# EAGLE board breakout1_laid_out (EAGLE 6.6.0)
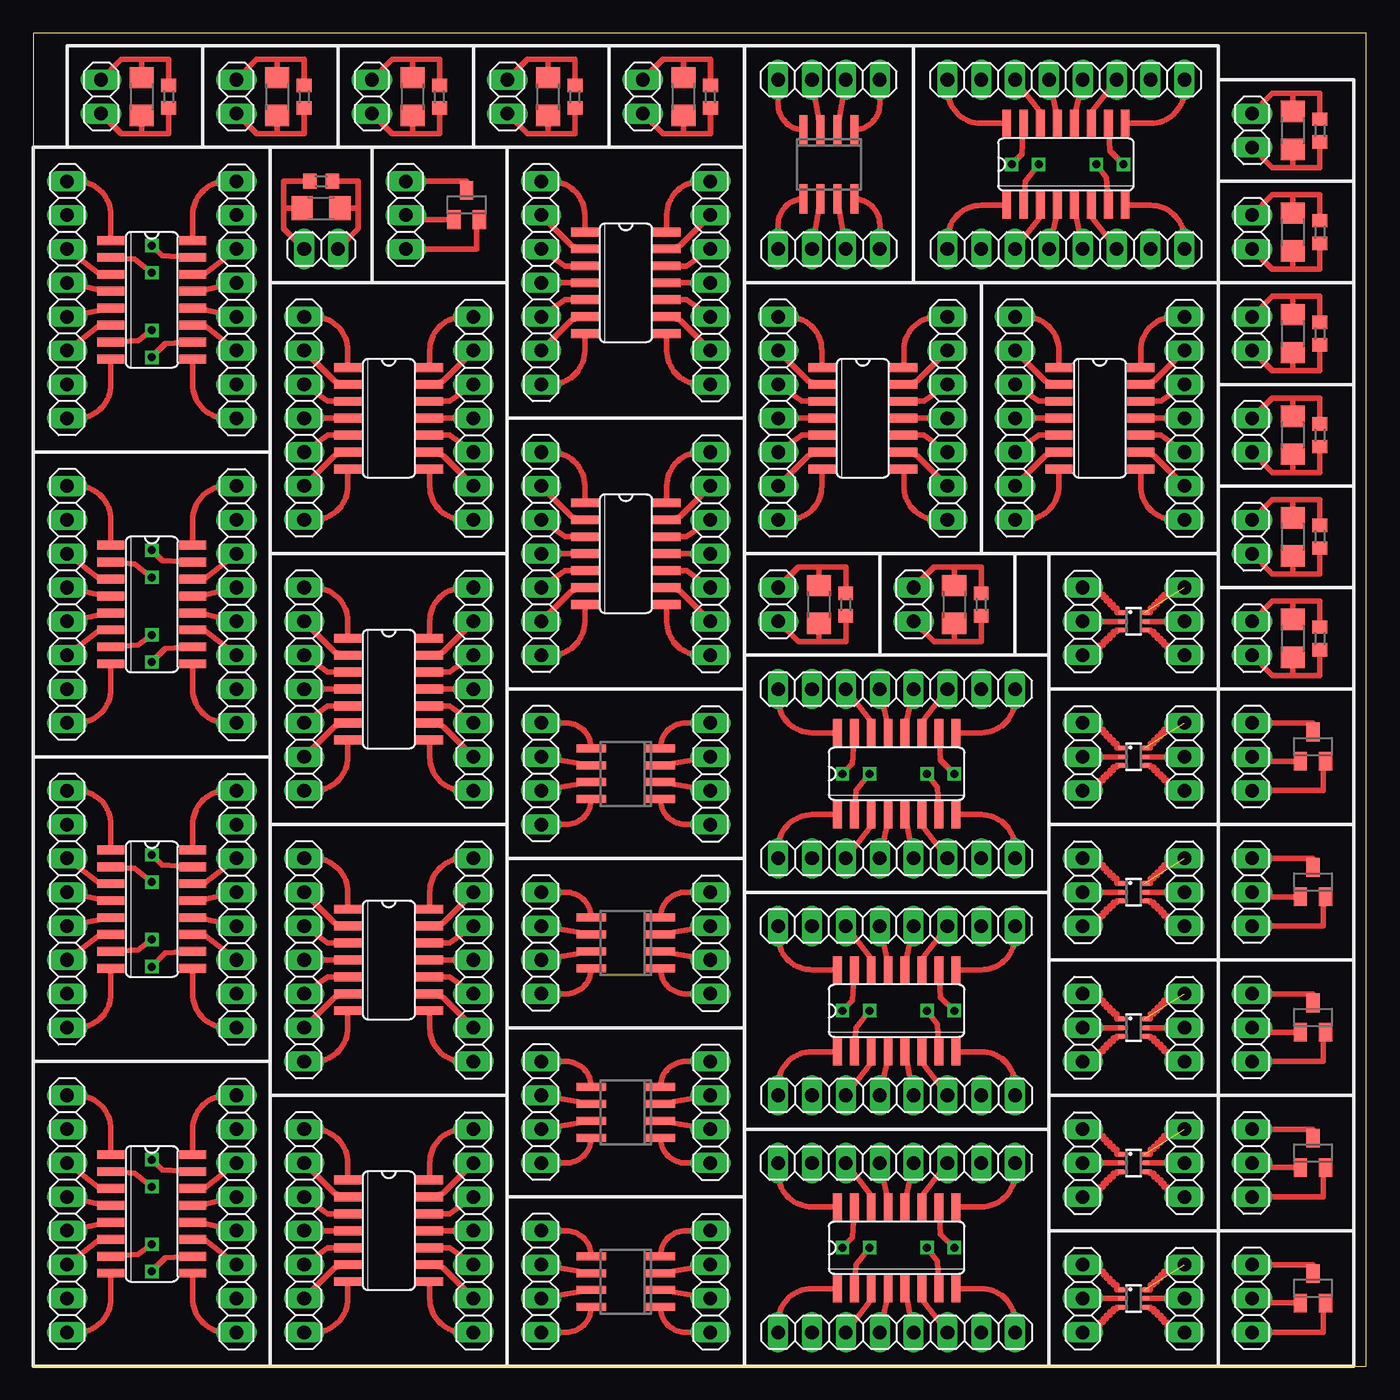
[diagram p0: board, top side]
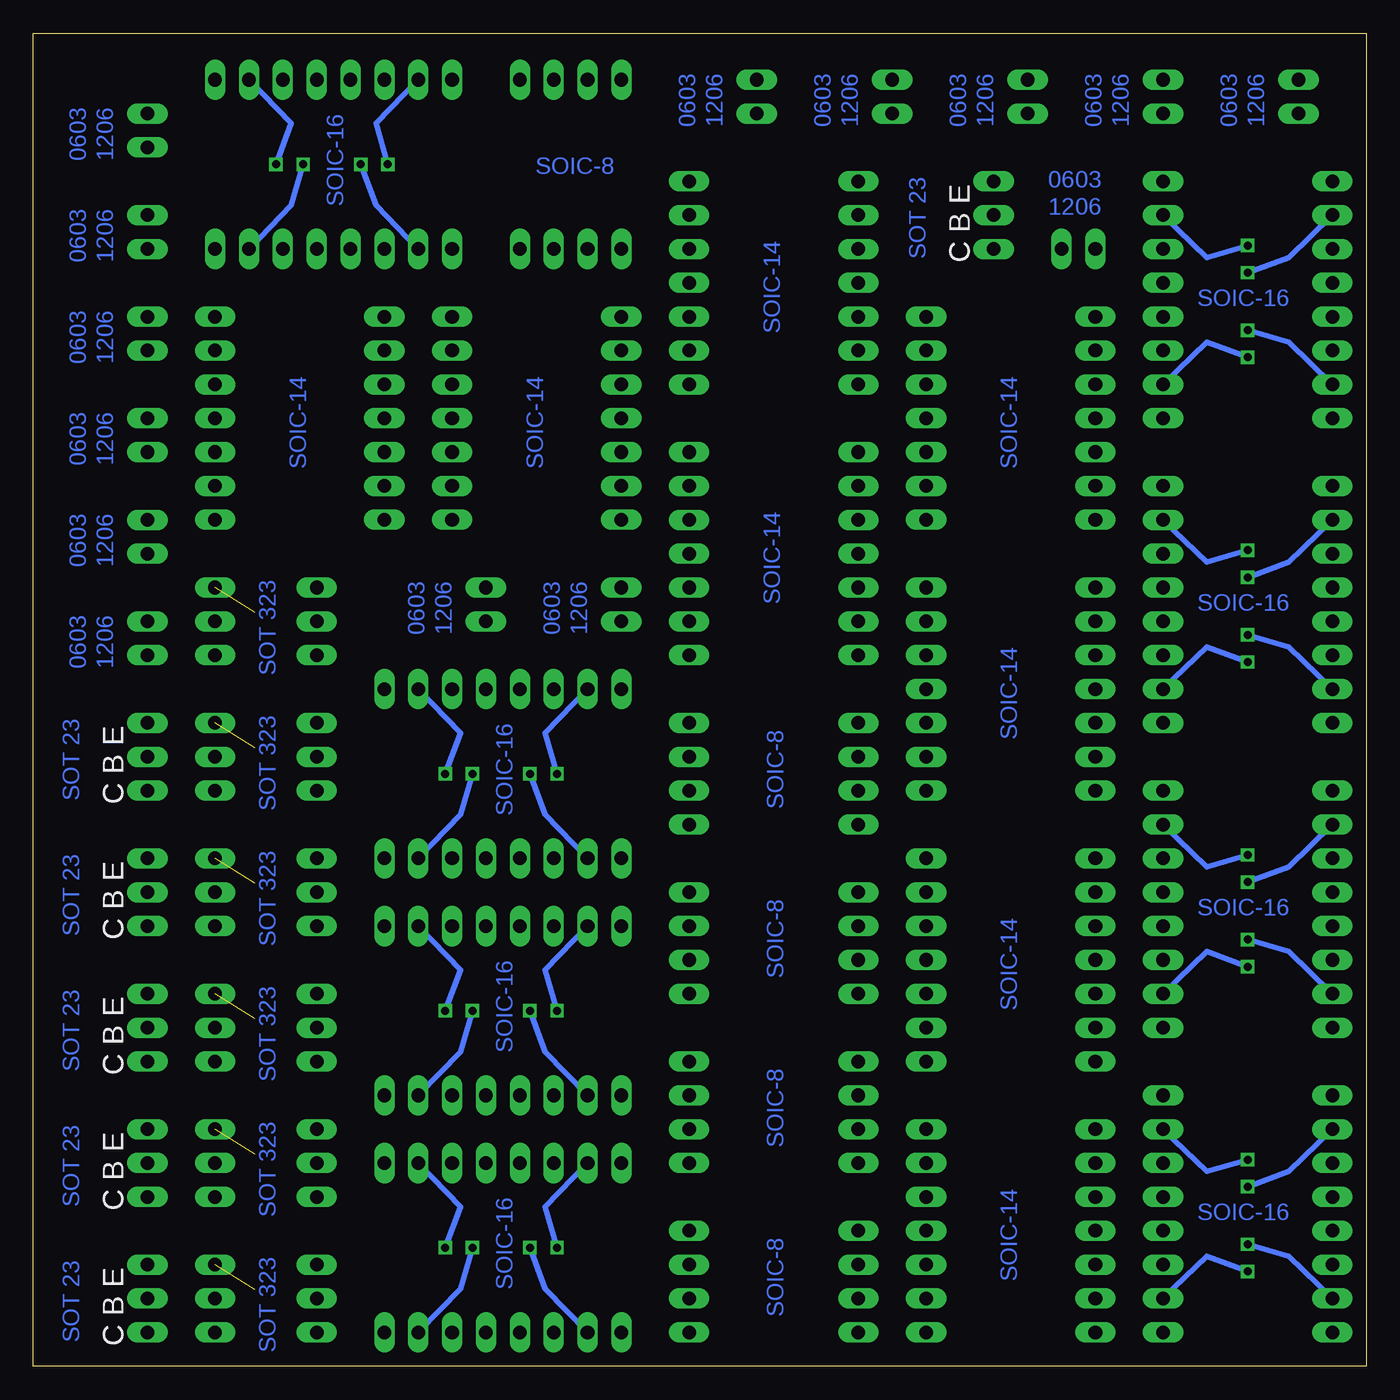
[diagram p1: board, bottom side, seen from below]

Size 100 x 100 mm. Coordinates in mm from the lower left corner, seen from the top.
Outline: 0,0 100,0 100,100 0,100 0,0
Copper layers (1*16): Top 0.035mm / dielectric 1.5mm / Bottom 0.035mm
Design rules "default": minimum track width 10mil, minimum drill 24mil, track to track 8mil, track to pad 8mil, pad to pad 8mil, via to via 8mil, smd to smd 8mil, copper to edge 40mil, drill to drill 8mil, minimum pad ring 10mil, minimum via ring 8mil, stop-mask expansion 4mil, vias tented up to drill 0mil, thermal gap 10mil

## Footprints (pad centres in the part's own frame; a part is rotated, then mirrored left to right if it is on the bottom)
SO16 = smd 0.66 x 2.032: 1 -4.445,-3.073; 2 -3.175,-3.073; 3 -1.905,-3.073; 4 -0.635,-3.073; 5 0.635,-3.073; 6 1.905,-3.073; 7 3.175,-3.073; 8 4.445,-3.073; 9 4.445,3.073; 10 3.175,3.073; 11 1.905,3.073; 12 0.635,3.073; 13 -0.635,3.073; 14 -1.905,3.073; 15 -3.175,3.073; 16 -4.445,3.073
SO08 = smd 0.6 x 2.2: 1 -1.905,-2.6; 2 -0.635,-2.6; 3 0.635,-2.6; 4 1.905,-2.6; 5 1.905,2.6; 6 0.635,2.6; 7 -0.635,2.6; 8 -1.905,2.6
SO14 = smd 0.66 x 2.032: 1 -3.81,-3.073; 2 -2.54,-3.073; 3 -1.27,-3.073; 4 0,-3.073; 5 1.27,-3.073; 6 2.54,-3.073; 7 3.81,-3.073; 8 3.81,3.073; 9 2.54,3.073; 10 1.27,3.073; 11 0,3.073; 12 -1.27,3.073; 13 -2.54,3.073; 14 -3.81,3.073
1X03 = drill 1.016 long: 1 -2.54,0; 2 0,0; 3 2.54,0
1X08 = drill 1.016 long: 1 -8.89,0; 2 -6.35,0; 3 -3.81,0; 4 -1.27,0; 5 1.27,0; 6 3.81,0; 7 6.35,0; 8 8.89,0
1X04 = drill 1.016 long: 1 -3.81,0; 2 -1.27,0; 3 1.27,0; 4 3.81,0
1X07 = drill 1.016 long: 1 -7.62,0; 2 -5.08,0; 3 -2.54,0; 4 0,0; 5 2.54,0; 6 5.08,0; 7 7.62,0
1X02 = drill 1.016 long: 1 -1.27,0; 2 1.27,0
SOT23 = smd 1 x 1.4: 1 -0.95,-1.1; 2 0.95,-1.1; 3 0,1.1
R0603 = smd 1 x 1.1: 1 -0.85,0; 2 0.85,0
R1206 = smd 1.6 x 1.803: 1 -1.422,0; 2 1.422,0
SOT363 = smd 0.3 x 0.7: 1 -0.65,-0.8; 2 0,-0.8; 3 0.65,-0.8; 4 0.65,0.8; 5 0,0.8; 6 -0.65,0.8

## Placement (x,y rotation side)
IC1  74LS151D  [SO16]  8.89,34.29 270 top
IC3  NE555D  [SO08]  44.45,6.35 90 top
IC4  74LS151D  [SO16]  8.89,11.43 270 top
IC5  74LS151D  [SO16]  8.89,57.15 270 top
IC7  74LS03D  [SO14]  26.67,10.16 270 top
IC8  74LS03D  [SO14]  26.67,30.48 270 top
IC10  NE555D  [SO08]  44.45,19.05 90 top
IC13  74LS151D  [SO16]  8.89,80.01 270 top
IC14  74LS03D  [SO14]  26.67,50.8 270 top
IC15  74LS03D  [SO14]  26.67,71.12 270 top
IC16  74LS03D  [SO14]  44.45,81.28 270 top
IC17  NE555D  [SO08]  44.45,31.75 90 top
IC18  NE555D  [SO08]  44.45,44.45 90 top
IC19  74LS03D  [SO14]  44.45,60.96 270 top
IC21  74LS151D  [SO16]  64.77,8.89 0 top
IC22  74LS151D  [SO16]  64.77,26.67 0 top
IC23  74LS151D  [SO16]  64.77,44.45 0 top
IC24  74LS03D  [SO14]  62.23,71.12 270 top
IC25  74LS03D  [SO14]  80.01,71.12 270 top
IC26  74LS151D  [SO16]  77.47,90.17 0 top
IC27  NE555D  [SO08]  59.69,90.17 180 top
JP1  [1X03]  78.74,5.08 90 top
JP2  [1X03]  86.36,5.08 90 top
JP5  [1X08]  15.24,34.29 90 top
JP6  [1X08]  2.54,34.29 270 top
JP9  [1X04]  50.8,6.35 90 top
JP10  [1X04]  38.1,6.35 270 top
JP11  [1X08]  15.24,11.43 90 top
JP12  [1X08]  2.54,11.43 270 top
JP13  [1X08]  15.24,57.15 90 top
JP14  [1X08]  2.54,57.15 270 top
JP17  [1X07]  20.32,10.16 270 top
JP18  [1X07]  33.02,10.16 90 top
JP19  [1X07]  20.32,30.48 270 top
JP20  [1X07]  33.02,30.48 90 top
JP23  [1X02]  91.44,92.71 270 top
JP24  [1X02]  91.44,85.09 270 top
JP25  [1X02]  5.08,95.25 270 top
JP31  [1X03]  78.74,15.24 90 top
JP32  [1X03]  86.36,15.24 90 top
JP35  [1X04]  50.8,19.05 90 top
JP36  [1X04]  38.1,19.05 270 top
JP41  [1X08]  15.24,80.01 90 top
JP42  [1X08]  2.54,80.01 270 top
JP43  [1X07]  20.32,50.8 270 top
JP44  [1X07]  33.02,50.8 90 top
JP45  [1X07]  20.32,71.12 270 top
JP46  [1X07]  33.02,71.12 90 top
JP47  [1X07]  38.1,81.28 270 top
JP48  [1X07]  50.8,81.28 90 top
JP49  [1X03]  91.44,5.08 270 top
JP50  [1X03]  91.44,15.24 270 top
JP51  [1X03]  91.44,25.4 270 top
JP52  [1X03]  91.44,35.56 270 top
JP53  [1X03]  91.44,45.72 270 top
JP54  [1X02]  91.44,62.23 270 top
JP55  [1X02]  91.44,77.47 270 top
JP56  [1X02]  91.44,69.85 270 top
JP57  [1X04]  50.8,31.75 90 top
JP58  [1X04]  38.1,31.75 270 top
JP59  [1X04]  50.8,44.45 90 top
JP60  [1X04]  38.1,44.45 270 top
JP61  [1X07]  38.1,60.96 270 top
JP62  [1X07]  50.8,60.96 90 top
JP63  [1X02]  21.59,83.82 0 top
JP65  [1X02]  91.44,54.61 270 top
JP66  [1X03]  78.74,45.72 90 top
JP67  [1X03]  86.36,45.72 90 top
JP68  [1X03]  78.74,55.88 90 top
JP69  [1X03]  86.36,55.88 90 top
JP70  [1X03]  78.74,25.4 90 top
JP71  [1X03]  86.36,25.4 90 top
JP72  [1X03]  78.74,35.56 90 top
JP73  [1X03]  86.36,35.56 90 top
JP74  [1X08]  64.77,15.24 180 top
JP75  [1X08]  64.77,2.54 0 top
JP76  [1X08]  64.77,33.02 180 top
JP77  [1X08]  64.77,20.32 0 top
JP78  [1X08]  64.77,50.8 180 top
JP79  [1X08]  64.77,38.1 0 top
JP80  [1X02]  55.88,57.15 270 top
JP81  [1X02]  66.04,57.15 270 top
JP82  [1X07]  55.88,71.12 270 top
JP83  [1X07]  68.58,71.12 90 top
JP84  [1X07]  73.66,71.12 270 top
JP85  [1X07]  86.36,71.12 90 top
JP86  [1X08]  77.47,96.52 180 top
JP87  [1X08]  77.47,83.82 0 top
JP88  [1X04]  59.69,96.52 180 top
JP89  [1X04]  59.69,83.82 0 top
JP91  [1X03]  27.94,86.36 270 top
JP92  [1X02]  15.24,95.25 270 top
JP93  [1X02]  25.4,95.25 270 top
JP94  [1X02]  35.56,95.25 270 top
JP95  [1X02]  45.72,95.25 270 top
Q5  BCX70SMD  [SOT23]  96.01,5.84 0 top
Q6  BCX70SMD  [SOT23]  96.01,16 0 top
Q7  BCX70SMD  [SOT23]  96.01,26.16 0 top
Q8  BCX70SMD  [SOT23]  96.01,36.32 0 top
Q9  BCX70SMD  [SOT23]  96.01,46.48 0 top
Q10  BCX70SMD  [SOT23]  32.51,87.12 0 top
R1  [R0603]  96.52,92.71 90 top
R3  [R1206]  94.49,92.71 90 top
R5  [R0603]  96.52,85.09 90 top
R6  [R1206]  94.49,85.09 90 top
R7  [R0603]  10.16,95.25 90 top
R8  [R1206]  8.13,95.25 90 top
R9  [R0603]  96.52,77.47 90 top
R10  [R1206]  94.49,77.47 90 top
R11  [R0603]  96.52,69.85 90 top
R12  [R1206]  94.49,69.85 90 top
R13  [R0603]  96.52,62.23 90 top
R14  [R1206]  94.49,62.23 90 top
R15  [R0603]  96.52,54.61 90 top
R16  [R1206]  94.49,54.61 90 top
R17  [R0603]  60.96,57.15 90 top
R18  [R1206]  58.93,57.15 90 top
R19  [R0603]  71.12,57.15 90 top
R20  [R1206]  69.09,57.15 90 top
R21  [R0603]  21.59,88.9 180 top
R22  [R1206]  21.59,86.87 180 top
R23  [R0603]  20.32,95.25 90 top
R24  [R1206]  18.29,95.25 90 top
R25  [R0603]  30.48,95.25 90 top
R26  [R1206]  28.45,95.25 90 top
R27  [R0603]  40.64,95.25 90 top
R28  [R1206]  38.61,95.25 90 top
R29  [R0603]  50.8,95.25 90 top
R30  [R1206]  48.77,95.25 90 top
U$1  DMMT3904W  [SOT363]  82.55,5.08 270 top
U$3  DMMT3904W  [SOT363]  82.55,15.24 270 top
U$5  DMMT3904W  [SOT363]  82.55,45.72 270 top
U$6  DMMT3904W  [SOT363]  82.55,55.88 270 top
U$7  DMMT3904W  [SOT363]  82.55,25.4 270 top
U$8  DMMT3904W  [SOT363]  82.55,35.56 270 top

## Library data of the parts
IC1 IC4 IC5 IC7 IC8 IC13-IC16 IC19 IC21-IC26 = 74xx-us
IC3 IC10 IC17 IC18 IC27 = linear
JP1 JP2 JP5 JP6 JP9-JP14 JP17-JP20 JP23-JP25 JP31 JP32 JP35 JP36 JP41-JP63 JP65-JP89 JP91-JP95 = pinhead
Q5-Q10 = transistor-npn
R1 R3 R5-R30 = rcl
U$1 U$3 U$5-U$8 = !synth_sch

## Nets
N$1: JP1.3 U$1.1
N$2: JP1.2 U$1.2
N$3: JP1.1 U$1.3
N$4: JP2.1 U$1.4
N$5: JP2.2 U$1.5
N$6: JP2.3 U$1.6
N$9: IC4.1 JP12.1
N$13: IC1.1 JP6.1
N$14: IC1.2 JP6.2
N$15: IC1.3 JP6.3
N$16: IC1.4 JP6.4
N$17: IC1.7 JP6.7
N$18: IC1.5 JP6.5
N$19: IC1.6 JP6.6
N$20: IC1.8 JP6.8
N$21: IC1.9 JP5.1
N$22: IC1.10 JP5.2
N$23: IC1.11 JP5.3
N$24: IC1.12 JP5.4
N$25: IC1.13 JP5.5
N$26: IC1.14 JP5.6
N$27: IC1.15 JP5.7
N$28: IC1.16 JP5.8
N$44: IC3.1 JP9.1
N$45: IC3.2 JP9.2
N$46: IC3.4 JP9.4
N$47: IC3.3 JP9.3
N$48: IC3.5 JP10.1
N$49: IC3.6 JP10.2
N$50: IC3.7 JP10.3
N$51: IC3.8 JP10.4
N$52: IC4.2 JP12.2
N$54: IC4.3 JP12.3
N$55: IC4.4 JP12.4
N$56: IC4.7 JP12.7
N$57: IC4.5 JP12.5
N$58: IC4.6 JP12.6
N$59: IC4.8 JP12.8
N$60: IC4.9 JP11.1
N$61: IC4.10 JP11.2
N$62: IC4.11 JP11.3
N$63: IC4.12 JP11.4
N$64: IC4.13 JP11.5
N$65: IC4.14 JP11.6
N$66: IC4.16 JP11.8
N$67: IC4.15 JP11.7
N$68: IC5.1 JP14.1
N$69: IC5.2 JP14.2
N$70: IC5.3 JP14.3
N$71: IC5.4 JP14.4
N$72: IC5.7 JP14.7
N$73: IC5.5 JP14.5
N$74: IC5.6 JP14.6
N$75: IC5.8 JP14.8
N$76: IC5.9 JP13.1
N$77: IC5.10 JP13.2
N$78: IC5.11 JP13.3
N$79: IC5.12 JP13.4
N$80: IC5.13 JP13.5
N$81: IC5.14 JP13.6
N$82: IC5.16 JP13.8
N$83: IC5.15 JP13.7
N$100: IC7.1 JP17.1
N$101: IC7.2 JP17.2
N$102: IC7.4 JP17.4
N$103: IC7.5 JP17.5
N$104: IC7.6 JP17.6
N$105: IC7.3 JP17.3
N$106: IC7.8 JP18.1
N$107: IC7.9 JP18.2
N$108: IC7.10 JP18.3
N$109: IC7.11 JP18.4
N$110: IC7.12 JP18.5
N$111: IC7.13 JP18.6
N$112: IC7.14 JP18.7
N$113: IC7.7 JP17.7
N$114: IC8.1 JP19.1
N$115: IC8.2 JP19.2
N$116: IC8.4 JP19.4
N$117: IC8.5 JP19.5
N$118: IC8.6 JP19.6
N$119: IC8.3 JP19.3
N$120: IC8.8 JP20.1
N$121: IC8.9 JP20.2
N$122: IC8.10 JP20.3
N$123: IC8.11 JP20.4
N$124: IC8.12 JP20.5
N$125: IC8.13 JP20.6
N$126: IC8.14 JP20.7
N$127: IC8.7 JP19.7
N$142: JP23.1 R1.2 R3.2
N$143: JP23.2 R1.1 R3.1
N$144: JP24.1 R5.2 R6.2
N$145: JP24.2 R5.1 R6.1
N$146: JP25.1 R7.2 R8.2
N$147: JP25.2 R7.1 R8.1
N$164: JP31.1 U$3.3
N$165: JP31.2 U$3.2
N$166: JP31.3 U$3.1
N$167: JP32.1 U$3.4
N$168: JP32.2 U$3.5
N$169: JP32.3 U$3.6
N$178: IC10.1 JP35.1
N$179: IC10.2 JP35.2
N$180: IC10.4 JP35.4
N$181: IC10.3 JP35.3
N$182: IC10.5 JP36.1
N$183: IC10.6 JP36.2
N$184: IC10.7 JP36.3
N$185: IC10.8 JP36.4
N$202: IC13.1 JP42.1
N$203: IC13.2 JP42.2
N$204: IC13.3 JP42.3
N$205: IC13.4 JP42.4
N$206: IC13.7 JP42.7
N$207: IC13.5 JP42.5
N$208: IC13.6 JP42.6
N$209: IC13.8 JP42.8
N$210: IC13.9 JP41.1
N$211: IC13.10 JP41.2
N$212: IC13.11 JP41.3
N$213: IC13.12 JP41.4
N$214: IC13.13 JP41.5
N$215: IC13.14 JP41.6
N$216: IC13.16 JP41.8
N$217: IC13.15 JP41.7
N$218: IC14.1 JP43.1
N$219: IC14.2 JP43.2
N$220: IC14.4 JP43.4
N$221: IC14.5 JP43.5
N$222: IC14.6 JP43.6
N$223: IC14.3 JP43.3
N$224: IC14.8 JP44.1
N$225: IC14.9 JP44.2
N$226: IC14.10 JP44.3
N$227: IC14.11 JP44.4
N$228: IC14.12 JP44.5
N$229: IC14.13 JP44.6
N$230: IC14.14 JP44.7
N$231: IC14.7 JP43.7
N$232: IC15.1 JP45.1
N$233: IC15.2 JP45.2
N$234: IC15.4 JP45.4
N$235: IC15.5 JP45.5
N$236: IC15.6 JP45.6
N$237: IC15.3 JP45.3
N$238: IC15.8 JP46.1
N$239: IC15.9 JP46.2
N$240: IC15.10 JP46.3
N$241: IC15.11 JP46.4
N$242: IC15.12 JP46.5
N$243: IC15.13 JP46.6
N$244: IC15.14 JP46.7
N$245: IC15.7 JP45.7
N$246: IC16.1 JP47.1
N$247: IC16.2 JP47.2
N$248: IC16.4 JP47.4
N$249: IC16.5 JP47.5
N$250: IC16.6 JP47.6
N$251: IC16.3 JP47.3
N$252: IC16.8 JP48.1
N$253: IC16.9 JP48.2
N$254: JP49.2 Q5.1
N$255: JP49.3 Q5.2
N$256: JP49.1 Q5.3
N$257: JP50.2 Q6.1
N$258: JP50.3 Q6.2
N$259: JP50.1 Q6.3
N$260: JP51.2 Q7.1
N$261: JP51.3 Q7.2
N$262: JP51.1 Q7.3
N$263: JP52.2 Q8.1
N$264: JP52.3 Q8.2
N$265: JP52.1 Q8.3
N$266: JP53.2 Q9.1
N$267: JP53.3 Q9.2
N$268: JP53.1 Q9.3
N$269: JP54.1 R13.2 R14.2
N$270: JP54.2 R13.1 R14.1
N$271: JP65.1 R15.2 R16.2
N$272: JP55.1 R9.2 R10.2
N$273: JP55.2 R9.1 R10.1
N$274: JP56.1 R11.2 R12.2
N$275: JP56.2 R11.1 R12.1
N$276: JP65.2 R15.1 R16.1
N$277: JP66.1 U$5.3
N$278: IC17.1 JP57.1
N$279: IC17.2 JP57.2
N$280: IC17.4 JP57.4
N$281: IC17.3 JP57.3
N$282: IC17.5 JP58.1
N$283: IC17.6 JP58.2
N$284: IC17.7 JP58.3
N$285: IC17.8 JP58.4
N$286: IC18.1 JP59.1
N$287: IC18.2 JP59.2
N$288: IC18.4 JP59.4
N$289: IC18.3 JP59.3
N$290: IC18.5 JP60.1
N$291: IC18.6 JP60.2
N$292: IC18.7 JP60.3
N$293: IC18.8 JP60.4
N$294: IC19.1 JP61.1
N$295: IC19.2 JP61.2
N$296: IC19.4 JP61.4
N$297: IC19.5 JP61.5
N$298: IC19.6 JP61.6
N$299: IC19.3 JP61.3
N$300: IC19.8 JP62.1
N$301: IC19.9 JP62.2
N$302: IC19.10 JP62.3
N$303: IC19.11 JP62.4
N$304: IC19.12 JP62.5
N$305: IC19.13 JP62.6
N$306: IC19.14 JP62.7
N$307: IC19.7 JP61.7
N$308: IC16.10 JP48.3
N$309: IC16.11 JP48.4
N$310: IC16.12 JP48.5
N$311: IC16.13 JP48.6
N$312: IC16.14 JP48.7
N$313: IC16.7 JP47.7
N$314: JP63.1 R21.2 R22.2
N$315: JP63.2 R21.1 R22.1
N$323: JP91.2 Q10.1
N$324: JP66.2 U$5.2
N$325: JP66.3 U$5.1
N$326: JP67.1 U$5.4
N$327: JP67.2 U$5.5
N$328: JP67.3 U$5.6
N$330: JP68.1 U$6.3
N$331: JP68.2 U$6.2
N$332: JP68.3 U$6.1
N$333: JP69.1 U$6.4
N$334: JP69.2 U$6.5
N$335: JP69.3 U$6.6
N$337: JP70.1 U$7.3
N$338: JP70.2 U$7.2
N$339: JP70.3 U$7.1
N$340: JP71.1 U$7.4
N$341: JP71.2 U$7.5
N$342: JP71.3 U$7.6
N$344: JP72.1 U$8.3
N$345: JP72.2 U$8.2
N$346: JP72.3 U$8.1
N$347: JP73.1 U$8.4
N$348: JP73.2 U$8.5
N$349: JP73.3 U$8.6
N$359: IC21.1 JP75.1
N$360: IC21.2 JP75.2
N$361: IC21.3 JP75.3
N$362: IC21.4 JP75.4
N$363: IC21.7 JP75.7
N$364: IC21.5 JP75.5
N$365: IC21.6 JP75.6
N$366: IC21.8 JP75.8
N$367: IC21.9 JP74.1
N$368: IC21.10 JP74.2
N$369: IC21.11 JP74.3
N$370: IC21.12 JP74.4
N$371: IC21.13 JP74.5
N$372: IC21.14 JP74.6
N$373: IC21.16 JP74.8
N$374: IC21.15 JP74.7
N$375: IC22.1 JP77.1
N$376: IC22.2 JP77.2
N$377: IC22.3 JP77.3
N$378: IC22.4 JP77.4
N$379: IC22.7 JP77.7
N$380: IC22.5 JP77.5
N$381: IC22.6 JP77.6
N$382: IC22.8 JP77.8
N$383: IC22.9 JP76.1
N$384: IC22.10 JP76.2
N$385: IC22.11 JP76.3
N$386: IC22.12 JP76.4
N$387: IC22.13 JP76.5
N$388: IC22.14 JP76.6
N$389: IC22.16 JP76.8
N$390: IC22.15 JP76.7
N$391: IC23.1 JP79.1
N$392: IC23.2 JP79.2
N$393: IC23.3 JP79.3
N$394: IC23.4 JP79.4
N$395: IC23.7 JP79.7
N$396: IC23.5 JP79.5
N$397: IC23.6 JP79.6
N$398: IC23.8 JP79.8
N$399: IC23.9 JP78.1
N$400: IC23.10 JP78.2
N$401: IC23.11 JP78.3
N$402: IC23.12 JP78.4
N$403: IC23.13 JP78.5
N$404: IC23.14 JP78.6
N$405: IC23.16 JP78.8
N$406: IC23.15 JP78.7
N$407: JP80.1 R17.2 R18.2
N$408: JP80.2 R17.1 R18.1
N$409: JP81.1 R19.2 R20.2
N$410: JP81.2 R19.1 R20.1
N$411: IC24.1 JP82.1
N$412: IC24.2 JP82.2
N$413: IC24.4 JP82.4
N$414: IC24.5 JP82.5
N$415: IC24.6 JP82.6
N$416: IC24.3 JP82.3
N$417: IC24.8 JP83.1
N$418: IC24.9 JP83.2
N$419: IC24.10 JP83.3
N$420: IC24.11 JP83.4
N$421: IC24.12 JP83.5
N$422: IC24.13 JP83.6
N$423: IC24.14 JP83.7
N$424: IC24.7 JP82.7
N$425: IC25.1 JP84.1
N$426: IC25.2 JP84.2
N$427: IC25.4 JP84.4
N$428: IC25.5 JP84.5
N$429: IC25.6 JP84.6
N$430: IC25.3 JP84.3
N$431: IC25.8 JP85.1
N$432: IC25.9 JP85.2
N$433: IC25.10 JP85.3
N$434: IC25.11 JP85.4
N$435: IC25.12 JP85.5
N$436: IC25.13 JP85.6
N$437: IC25.14 JP85.7
N$438: IC25.7 JP84.7
N$439: IC26.1 JP87.1
N$440: IC26.2 JP87.2
N$441: IC26.3 JP87.3
N$442: IC26.4 JP87.4
N$443: IC26.7 JP87.7
N$444: IC26.5 JP87.5
N$445: IC26.6 JP87.6
N$446: IC26.8 JP87.8
N$447: IC26.9 JP86.1
N$448: IC26.10 JP86.2
N$449: IC26.11 JP86.3
N$450: IC26.12 JP86.4
N$451: IC26.13 JP86.5
N$452: IC26.14 JP86.6
N$453: IC26.16 JP86.8
N$454: IC26.15 JP86.7
N$455: IC27.1 JP88.1
N$456: IC27.2 JP88.2
N$457: IC27.4 JP88.4
N$458: IC27.3 JP88.3
N$459: IC27.5 JP89.1
N$460: IC27.6 JP89.2
N$461: IC27.7 JP89.3
N$462: IC27.8 JP89.4
N$463: JP91.3 Q10.2
N$464: JP91.1 Q10.3
N$465: JP92.1 R23.2 R24.2
N$466: JP92.2 R23.1 R24.1
N$467: JP93.1 R25.2 R26.2
N$468: JP93.2 R25.1 R26.1
N$469: JP94.1 R27.2 R28.2
N$470: JP94.2 R27.1 R28.1
N$471: JP95.1 R29.2 R30.2
N$472: JP95.2 R29.1 R30.1

## Tracks (layer width: path | path; a pad name or v marks a point on that pad's centre or on a via)
N$1
  Top 0.406: U$1.1 81.28,5.73 81.28,6.1 81.03,6.1 81.03,6.35 80.77,6.35 80.77,6.6 80.52,6.6 80.52,6.86 80.26,6.86 80.26,7.11 80.01,7.11 80.01,7.37 79.76,7.37 79.76,7.62 JP1.3
N$2
  Top 0.406: U$1.2 JP1.2
N$3
  Top 0.406: U$1.3 81.28,4.43 81.28,4.32 81.03,4.32 81.03,4.06 80.77,4.06 80.77,3.81 80.52,3.81 80.52,3.56 80.26,3.56 80.26,3.3 80.01,3.3 80.01,3.05 79.76,3.05 | 79.5,3.05 79.76,3.05 | 79.76,3.05 79.76,2.79 79.5,2.79 79.5,2.54 JP1.1
N$4
  Top 0.406: U$1.4 83.82,4.43 83.82,4.32 84.07,4.32 84.07,4.06 84.33,4.06 84.33,3.81 84.58,3.81 84.58,3.56 84.84,3.56 84.84,3.3 85.09,3.3 85.09,3.05 85.34,3.05 85.34,2.79 85.6,2.79 85.6,2.54 JP2.1
N$5
  Top 0.406: U$1.5 JP2.2
N$6  (1 unrouted)
N$7
  Top 0.406: 83.35,5.73 83.82,5.73 83.82,6.1 84.07,6.1 84.07,6.35 84.33,6.35 84.33,6.6 84.58,6.6 84.58,6.86 84.84,6.86 84.84,7.11 85.09,7.11 85.09,7.37 85.34,7.37 85.34,7.62 86.36,7.62
N$9
  Top 0.406: IC4.1 5.82,17.78 arc90 3.28,20.32 JP12.1
N$13
  Top 0.406: IC1.1 5.82,40.64 arc90 3.28,43.18 JP6.1
N$14  (via drill 0.6)
  Top 0.406: v8.89,36.32 7.62,37.34 IC1.2
  Bottom 0.406: JP6.2 IC1.2 v8.89,36.32
N$15
  Top 0.406: JP6.3 4.83,36.32 IC1.3
N$16
  Top 0.406: JP6.4 4.83,35.05 IC1.4
N$17  (via drill 0.6)
  Top 0.406: v8.89,32 7.87,31.24 IC1.7
  Bottom 0.406: JP6.7 IC1.7 v8.89,32
N$18
  Top 0.406: JP6.5 5.08,33.53 IC1.5
N$19
  Top 0.406: JP6.6 4.83,32.26 IC1.6
N$20
  Top 0.406: IC1.8 5.82,27.94 arc-90 3.28,25.4 JP6.8
N$21
  Top 0.406: IC1.9 11.96,27.94 arc90 14.5,25.4 JP5.1
N$22  (via drill 0.6)
  Top 0.406: v8.89,29.97 9.91,30.99 IC1.10
  Bottom 0.406: JP5.2 IC1.10 v8.89,29.97
N$23
  Top 0.406: JP5.3 12.95,32.26 IC1.11
N$24
  Top 0.406: JP5.4 12.95,33.53 IC1.12
N$25
  Top 0.406: JP5.5 12.95,35.05 IC1.13
N$26
  Top 0.406: JP5.6 12.95,36.32 IC1.14
N$27  (via drill 0.6)
  Top 0.406: v8.89,38.35 9.65,37.59 IC1.15
  Bottom 0.406: JP5.7 IC1.15 v8.89,38.35
N$28
  Top 0.406: IC1.16 11.96,40.64 arc-90 14.5,43.18 JP5.8
N$44
  Top 0.406: IC3.1 arc90 48.95,2.54 JP9.1
N$45
  Top 0.406: IC3.2 JP9.2
N$46
  Top 0.406: IC3.4 arc-90 48.95,10.16 JP9.4
N$47
  Top 0.406: IC3.3 JP9.3
N$48
  Top 0.406: IC3.5 arc90 39.95,10.16 JP10.1
N$49
  Top 0.406: IC3.6 JP10.2
N$50
  Top 0.406: IC3.7 JP10.3
N$51
  Top 0.406: IC3.8 arc-90 39.95,2.54 JP10.4
N$52  (via drill 0.6)
  Top 0.406: v8.89,13.46 7.62,14.48 IC4.2
  Bottom 0.406: JP12.2 IC4.2 v8.89,13.46
N$54
  Top 0.406: JP12.3 4.83,13.46 IC4.3
N$55
  Top 0.406: JP12.4 4.83,12.19 IC4.4
N$56  (via drill 0.6)
  Top 0.406: v8.89,9.14 7.87,8.38 IC4.7
  Bottom 0.406: JP12.7 IC4.7 v8.89,9.14
N$57
  Top 0.406: JP12.5 5.08,10.67 IC4.5
N$58
  Top 0.406: JP12.6 4.83,9.4 IC4.6
N$59
  Top 0.406: IC4.8 5.82,5.08 arc-90 3.28,2.54 JP12.8
N$60
  Top 0.406: IC4.9 11.96,5.08 arc90 14.5,2.54 JP11.1
N$61  (via drill 0.6)
  Top 0.406: v8.89,7.11 9.91,8.13 IC4.10
  Bottom 0.406: JP11.2 IC4.10 v8.89,7.11
N$62
  Top 0.406: JP11.3 12.95,9.4 IC4.11
N$63
  Top 0.406: JP11.4 12.95,10.67 IC4.12
N$64
  Top 0.406: JP11.5 12.95,12.19 IC4.13
N$65
  Top 0.406: JP11.6 12.95,13.46 IC4.14
N$66
  Top 0.406: IC4.16 11.96,17.78 arc-90 14.5,20.32 JP11.8
N$67  (via drill 0.6)
  Top 0.406: v8.89,15.49 9.65,14.73 IC4.15
  Bottom 0.406: JP11.7 IC4.15 v8.89,15.49
N$68
  Top 0.406: IC5.1 5.82,63.5 arc90 3.28,66.04 JP14.1
N$69  (via drill 0.6)
  Top 0.406: v8.89,59.18 7.62,60.2 IC5.2
  Bottom 0.406: JP14.2 IC5.2 v8.89,59.18
N$70
  Top 0.406: JP14.3 4.83,59.18 IC5.3
N$71
  Top 0.406: JP14.4 4.83,57.91 IC5.4
N$72  (via drill 0.6)
  Top 0.406: v8.89,54.86 7.87,54.1 IC5.7
  Bottom 0.406: JP14.7 IC5.7 v8.89,54.86
N$73
  Top 0.406: JP14.5 5.08,56.39 IC5.5
N$74
  Top 0.406: JP14.6 4.83,55.12 IC5.6
N$75
  Top 0.406: IC5.8 5.82,50.8 arc-90 3.28,48.26 JP14.8
N$76
  Top 0.406: IC5.9 11.96,50.8 arc90 14.5,48.26 JP13.1
N$77  (via drill 0.6)
  Top 0.406: v8.89,52.83 9.91,53.85 IC5.10
  Bottom 0.406: JP13.2 IC5.10 v8.89,52.83
N$78
  Top 0.406: JP13.3 12.95,55.12 IC5.11
N$79
  Top 0.406: JP13.4 12.95,56.39 IC5.12
N$80
  Top 0.406: JP13.5 12.95,57.91 IC5.13
N$81
  Top 0.406: JP13.6 12.95,59.18 IC5.14
N$82
  Top 0.406: IC5.16 11.96,63.5 arc-90 14.5,66.04 JP13.8
N$83  (via drill 0.6)
  Top 0.406: v8.89,61.21 9.65,60.45 IC5.15
  Bottom 0.406: JP13.7 IC5.15 v8.89,61.21
N$100
  Top 0.406: IC7.1 23.6,15.24 arc90 21.06,17.78 JP17.1
N$101
  Top 0.406: IC7.2 22.61,12.95 JP17.2
N$102
  Top 0.406: IC7.4 JP17.4
N$103
  Top 0.406: IC7.5 22.1,8.89 JP17.5
N$104
  Top 0.406: IC7.6 22.61,7.37 JP17.6
N$105
  Top 0.406: IC7.3 22.1,11.43 JP17.3
N$106
  Top 0.406: IC7.8 29.74,5.08 arc90 32.28,2.54 JP18.1
N$107
  Top 0.406: IC7.9 30.73,7.37 JP18.2
N$108
  Top 0.406: IC7.10 31.24,8.89 JP18.3
N$109
  Top 0.406: IC7.11 JP18.4
N$110
  Top 0.406: IC7.12 31.24,11.43 JP18.5
N$111
  Top 0.406: IC7.13 30.73,12.95 JP18.6
N$112
  Top 0.406: IC7.14 29.74,15.24 arc-90 32.28,17.78 JP18.7
N$113
  Top 0.406: IC7.7 23.6,5.08 arc-90 21.06,2.54 JP17.7
N$114
  Top 0.406: IC8.1 23.6,35.56 arc90 21.06,38.1 JP19.1
N$115
  Top 0.406: IC8.2 22.61,33.27 JP19.2
N$116
  Top 0.406: IC8.4 JP19.4
N$117
  Top 0.406: IC8.5 22.1,29.21 JP19.5
N$118
  Top 0.406: IC8.6 22.61,27.69 JP19.6
N$119
  Top 0.406: IC8.3 22.1,31.75 JP19.3
N$120
  Top 0.406: IC8.8 29.74,25.4 arc90 32.28,22.86 JP20.1
N$121
  Top 0.406: IC8.9 30.73,27.69 JP20.2
N$122
  Top 0.406: IC8.10 31.24,29.21 JP20.3
N$123
  Top 0.406: IC8.11 JP20.4
N$124
  Top 0.406: IC8.12 31.24,31.75 JP20.5
N$125
  Top 0.406: IC8.13 30.73,33.27 JP20.6
N$126
  Top 0.406: IC8.14 29.74,35.56 arc-90 32.28,38.1 JP20.7
N$127
  Top 0.406: IC8.7 23.6,25.4 arc-90 21.06,22.86 JP19.7
N$142
  Top 0.406: R1.2 96.52,95.5 94.49,95.5 | R3.2 94.49,95.5 | 94.49,95.5 92.96,95.5 JP23.1
N$143
  Top 0.406: R1.1 96.52,89.92 94.49,89.92 | R3.1 94.49,89.92 | 94.49,89.92 92.96,89.92 JP23.2
N$144
  Top 0.406: R5.2 96.52,87.88 94.49,87.88 | R6.2 94.49,87.88 | 94.49,87.88 92.96,87.88 JP24.1
N$145
  Top 0.406: R5.1 96.52,82.3 94.49,82.3 | R6.1 94.49,82.3 | 94.49,82.3 92.96,82.3 JP24.2
N$146
  Top 0.406: R7.2 10.16,98.04 8.13,98.04 | R8.2 8.13,98.04 | 8.13,98.04 6.6,98.04 JP25.1
N$147
  Top 0.406: R7.1 10.16,92.46 8.13,92.46 | R8.1 8.13,92.46 | 8.13,92.46 6.6,92.46 JP25.2
N$164
  Top 0.406: U$3.3 81.28,14.59 81.28,14.48 81.03,14.48 81.03,14.22 80.77,14.22 80.77,13.97 80.52,13.97 80.52,13.72 80.26,13.72 80.26,13.46 80.01,13.46 80.01,13.21 79.76,13.21 | 79.5,13.21 79.76,13.21 | 79.76,13.21 79.76,12.95 79.5,12.95 79.5,12.7 JP31.1
N$165
  Top 0.406: U$3.2 JP31.2
N$166
  Top 0.406: U$3.1 81.28,15.89 81.28,16.26 81.03,16.26 81.03,16.51 80.77,16.51 80.77,16.76 80.52,16.76 80.52,17.02 80.26,17.02 80.26,17.27 80.01,17.27 80.01,17.53 79.76,17.53 79.76,17.78 JP31.3
N$167
  Top 0.406: U$3.4 83.82,14.59 83.82,14.48 84.07,14.48 84.07,14.22 84.33,14.22 84.33,13.97 84.58,13.97 84.58,13.72 84.84,13.72 84.84,13.46 85.09,13.46 85.09,13.21 85.34,13.21 85.34,12.95 85.6,12.95 85.6,12.7 JP32.1
N$168
  Top 0.406: U$3.5 JP32.2
N$169  (1 unrouted)
N$170
  Top 0.406: 83.35,15.89 83.82,15.89 83.82,16.26 84.07,16.26 84.07,16.51 84.33,16.51 84.33,16.76 84.58,16.76 84.58,17.02 84.84,17.02 84.84,17.27 85.09,17.27 85.09,17.53 85.34,17.53 85.34,17.78 86.36,17.78
N$178
  Top 0.406: IC10.1 arc90 48.95,15.24 JP35.1
N$179
  Top 0.406: IC10.2 JP35.2
N$180
  Top 0.406: IC10.4 arc-90 48.95,22.86 JP35.4
N$181
  Top 0.406: IC10.3 JP35.3
N$182
  Top 0.406: IC10.5 arc90 39.95,22.86 JP36.1
N$183
  Top 0.406: IC10.6 JP36.2
N$184
  Top 0.406: IC10.7 JP36.3
N$185
  Top 0.406: IC10.8 arc-90 39.95,15.24 JP36.4
N$202
  Top 0.406: IC13.1 5.82,86.36 arc90 3.28,88.9 JP42.1
N$203  (via drill 0.6)
  Top 0.406: v8.89,82.04 7.62,83.06 IC13.2
  Bottom 0.406: JP42.2 IC13.2 v8.89,82.04
N$204
  Top 0.406: JP42.3 4.83,82.04 IC13.3
N$205
  Top 0.406: JP42.4 4.83,80.77 IC13.4
N$206  (via drill 0.6)
  Top 0.406: v8.89,77.72 7.87,76.96 IC13.7
  Bottom 0.406: JP42.7 IC13.7 v8.89,77.72
N$207
  Top 0.406: JP42.5 5.08,79.25 IC13.5
N$208
  Top 0.406: JP42.6 4.83,77.98 IC13.6
N$209
  Top 0.406: IC13.8 5.82,73.66 arc-90 3.28,71.12 JP42.8
N$210
  Top 0.406: IC13.9 11.96,73.66 arc90 14.5,71.12 JP41.1
N$211  (via drill 0.6)
  Top 0.406: v8.89,75.69 9.91,76.71 IC13.10
  Bottom 0.406: JP41.2 IC13.10 v8.89,75.69
N$212
  Top 0.406: JP41.3 12.95,77.98 IC13.11
N$213
  Top 0.406: JP41.4 12.95,79.25 IC13.12
N$214
  Top 0.406: JP41.5 12.95,80.77 IC13.13
N$215
  Top 0.406: JP41.6 12.95,82.04 IC13.14
N$216
  Top 0.406: IC13.16 11.96,86.36 arc-90 14.5,88.9 JP41.8
N$217  (via drill 0.6)
  Top 0.406: v8.89,84.07 9.65,83.31 IC13.15
  Bottom 0.406: JP41.7 IC13.15 v8.89,84.07
N$218
  Top 0.406: IC14.1 23.6,55.88 arc90 21.06,58.42 JP43.1
N$219
  Top 0.406: IC14.2 22.61,53.59 JP43.2
N$220
  Top 0.406: IC14.4 JP43.4
N$221
  Top 0.406: IC14.5 22.1,49.53 JP43.5
N$222
  Top 0.406: IC14.6 22.61,48.01 JP43.6
N$223
  Top 0.406: IC14.3 22.1,52.07 JP43.3
N$224
  Top 0.406: IC14.8 29.74,45.72 arc90 32.28,43.18 JP44.1
N$225
  Top 0.406: IC14.9 30.73,48.01 JP44.2
N$226
  Top 0.406: IC14.10 31.24,49.53 JP44.3
N$227
  Top 0.406: IC14.11 JP44.4
N$228
  Top 0.406: IC14.12 31.24,52.07 JP44.5
N$229
  Top 0.406: IC14.13 30.73,53.59 JP44.6
N$230
  Top 0.406: IC14.14 29.74,55.88 arc-90 32.28,58.42 JP44.7
N$231
  Top 0.406: IC14.7 23.6,45.72 arc-90 21.06,43.18 JP43.7
N$232
  Top 0.406: IC15.1 23.6,76.2 arc90 21.06,78.74 JP45.1
N$233
  Top 0.406: IC15.2 22.61,73.91 JP45.2
N$234
  Top 0.406: IC15.4 JP45.4
N$235
  Top 0.406: IC15.5 22.1,69.85 JP45.5
N$236
  Top 0.406: IC15.6 22.61,68.33 JP45.6
N$237
  Top 0.406: IC15.3 22.1,72.39 JP45.3
N$238
  Top 0.406: IC15.8 29.74,66.04 arc90 32.28,63.5 JP46.1
N$239
  Top 0.406: IC15.9 30.73,68.33 JP46.2
N$240
  Top 0.406: IC15.10 31.24,69.85 JP46.3
N$241
  Top 0.406: IC15.11 JP46.4
N$242
  Top 0.406: IC15.12 31.24,72.39 JP46.5
N$243
  Top 0.406: IC15.13 30.73,73.91 JP46.6
N$244
  Top 0.406: IC15.14 29.74,76.2 arc-90 32.28,78.74 JP46.7
N$245
  Top 0.406: IC15.7 23.6,66.04 arc-90 21.06,63.5 JP45.7
N$246
  Top 0.406: IC16.1 41.38,86.36 arc90 38.84,88.9 JP47.1
N$247
  Top 0.406: IC16.2 40.39,84.07 JP47.2
N$248
  Top 0.406: IC16.4 JP47.4
N$249
  Top 0.406: IC16.5 39.88,80.01 JP47.5
N$250
  Top 0.406: IC16.6 40.39,78.49 JP47.6
N$251
  Top 0.406: IC16.3 39.88,82.55 JP47.3
N$252
  Top 0.406: IC16.8 47.52,76.2 arc90 50.06,73.66 JP48.1
N$253
  Top 0.406: IC16.9 48.51,78.49 JP48.2
N$254
  Top 0.406: Q5.1 91.44,4.74 JP49.2
N$255
  Top 0.406: Q5.2 96.77,4.74 96.77,2.54 JP49.3
N$256
  Top 0.406: Q5.3 96.01,7.62 JP49.1
N$257
  Top 0.406: Q6.1 91.44,14.9 JP50.2
N$258
  Top 0.406: Q6.2 96.77,14.9 96.77,12.7 JP50.3
N$259
  Top 0.406: Q6.3 96.01,17.78 JP50.1
N$260
  Top 0.406: Q7.1 91.44,25.06 JP51.2
N$261
  Top 0.406: Q7.2 96.77,25.06 96.77,22.86 JP51.3
N$262
  Top 0.406: Q7.3 96.01,27.94 JP51.1
N$263
  Top 0.406: Q8.1 91.44,35.22 JP52.2
N$264
  Top 0.406: Q8.2 96.77,35.22 96.77,33.02 JP52.3
N$265
  Top 0.406: Q8.3 96.01,38.1 JP52.1
N$266
  Top 0.406: Q9.1 91.44,45.38 JP53.2
N$267
  Top 0.406: Q9.2 96.77,45.38 96.77,43.18 JP53.3
N$268
  Top 0.406: Q9.3 96.01,48.26 JP53.1
N$269
  Top 0.406: R13.2 96.52,65.02 94.49,65.02 | R14.2 94.49,65.02 | 94.49,65.02 92.96,65.02 JP54.1
N$270
  Top 0.406: R13.1 96.52,59.44 94.49,59.44 | R14.1 94.49,59.44 | 94.49,59.44 92.96,59.44 JP54.2
N$271
  Top 0.406: R15.2 96.52,57.4 94.49,57.4 | R16.2 94.49,57.4 | 94.49,57.4 92.96,57.4 JP65.1
N$272
  Top 0.406: R9.2 96.52,80.26 94.49,80.26 | R10.2 94.49,80.26 | 94.49,80.26 92.96,80.26 JP55.1
N$273
  Top 0.406: R9.1 96.52,74.68 94.49,74.68 | R10.1 94.49,74.68 | 94.49,74.68 92.96,74.68 JP55.2
N$274
  Top 0.406: R11.2 96.52,72.64 94.49,72.64 | R12.2 94.49,72.64 | 94.49,72.64 92.96,72.64 JP56.1
N$275
  Top 0.406: R11.1 96.52,67.06 94.49,67.06 | R12.1 94.49,67.06 | 94.49,67.06 92.96,67.06 JP56.2
N$276
  Top 0.406: R15.1 96.52,51.82 94.49,51.82 | R16.1 94.49,51.82 | 94.49,51.82 92.96,51.82 JP65.2
N$277
  Top 0.406: U$5.3 81.28,45.07 81.28,44.96 81.03,44.96 81.03,44.7 80.77,44.7 80.77,44.45 80.52,44.45 80.52,44.2 80.26,44.2 80.26,43.94 80.01,43.94 80.01,43.69 79.76,43.69 | 79.5,43.69 79.76,43.69 | 79.76,43.69 79.76,43.43 79.5,43.43 79.5,43.18 JP66.1
N$278
  Top 0.406: IC17.1 arc90 48.95,27.94 JP57.1
N$279
  Top 0.406: IC17.2 JP57.2
N$280
  Top 0.406: IC17.4 arc-90 48.95,35.56 JP57.4
N$281
  Top 0.406: IC17.3 JP57.3
N$282
  Top 0.406: IC17.5 arc90 39.95,35.56 JP58.1
N$283
  Top 0.406: IC17.6 JP58.2
N$284
  Top 0.406: IC17.7 JP58.3
N$285
  Top 0.406: IC17.8 arc-90 39.95,27.94 JP58.4
N$286
  Top 0.406: IC18.1 arc90 48.95,40.64 JP59.1
N$287
  Top 0.406: IC18.2 JP59.2
N$288
  Top 0.406: IC18.4 arc-90 48.95,48.26 JP59.4
N$289
  Top 0.406: IC18.3 JP59.3
N$290
  Top 0.406: IC18.5 arc90 39.95,48.26 JP60.1
N$291
  Top 0.406: IC18.6 JP60.2
N$292
  Top 0.406: IC18.7 JP60.3
N$293
  Top 0.406: IC18.8 arc-90 39.95,40.64 JP60.4
N$294
  Top 0.406: IC19.1 41.38,66.04 arc90 38.84,68.58 JP61.1
N$295
  Top 0.406: IC19.2 40.39,63.75 JP61.2
N$296
  Top 0.406: IC19.4 JP61.4
N$297
  Top 0.406: IC19.5 39.88,59.69 JP61.5
N$298
  Top 0.406: IC19.6 40.39,58.17 JP61.6
N$299
  Top 0.406: IC19.3 39.88,62.23 JP61.3
N$300
  Top 0.406: IC19.8 47.52,55.88 arc90 50.06,53.34 JP62.1
N$301
  Top 0.406: IC19.9 48.51,58.17 JP62.2
N$302
  Top 0.406: IC19.10 49.02,59.69 JP62.3
N$303
  Top 0.406: IC19.11 JP62.4
N$304
  Top 0.406: IC19.12 49.02,62.23 JP62.5
N$305
  Top 0.406: IC19.13 48.51,63.75 JP62.6
N$306
  Top 0.406: IC19.14 47.52,66.04 arc-90 50.06,68.58 JP62.7
N$307
  Top 0.406: IC19.7 41.38,55.88 arc-90 38.84,53.34 JP61.7
N$308
  Top 0.406: IC16.10 49.02,80.01 JP48.3
N$309
  Top 0.406: IC16.11 JP48.4
N$310
  Top 0.406: IC16.12 49.02,82.55 JP48.5
N$311
  Top 0.406: IC16.13 48.51,84.07 JP48.6
N$312
  Top 0.406: IC16.14 47.52,86.36 arc-90 50.06,88.9 JP48.7
N$313
  Top 0.406: IC16.7 41.38,76.2 arc-90 38.84,73.66 JP47.7
N$314
  Top 0.406: R21.2 18.8,88.9 18.8,86.87 | R22.2 18.8,86.87 | 18.8,86.87 18.8,85.34 JP63.1
N$315
  Top 0.406: R21.1 24.38,88.9 24.38,86.87 | R22.1 24.38,86.87 | 24.38,86.87 24.38,85.34 JP63.2
N$323
  Top 0.406: Q10.1 27.94,86.02 JP91.2
N$324
  Top 0.406: U$5.2 JP66.2
N$325
  Top 0.406: U$5.1 81.28,46.37 81.28,46.74 81.03,46.74 81.03,46.99 80.77,46.99 80.77,47.24 80.52,47.24 80.52,47.5 80.26,47.5 80.26,47.75 80.01,47.75 80.01,48.01 79.76,48.01 79.76,48.26 JP66.3
N$326
  Top 0.406: U$5.4 83.82,45.07 83.82,44.96 84.07,44.96 84.07,44.7 84.33,44.7 84.33,44.45 84.58,44.45 84.58,44.2 84.84,44.2 84.84,43.94 85.09,43.94 85.09,43.69 85.34,43.69 85.34,43.43 85.6,43.43 85.6,43.18 JP67.1
N$327
  Top 0.406: U$5.5 JP67.2
N$328  (1 unrouted)
N$329
  Top 0.406: 83.35,46.37 83.82,46.37 83.82,46.74 84.07,46.74 84.07,46.99 84.33,46.99 84.33,47.24 84.58,47.24 84.58,47.5 84.84,47.5 84.84,47.75 85.09,47.75 85.09,48.01 85.34,48.01 85.34,48.26 86.36,48.26
N$330
  Top 0.406: U$6.3 81.28,55.23 81.28,55.12 81.03,55.12 81.03,54.86 80.77,54.86 80.77,54.61 80.52,54.61 80.52,54.36 80.26,54.36 80.26,54.1 80.01,54.1 80.01,53.85 79.76,53.85 | 79.5,53.85 79.76,53.85 | 79.76,53.85 79.76,53.59 79.5,53.59 79.5,53.34 JP68.1
N$331
  Top 0.406: U$6.2 JP68.2
N$332
  Top 0.406: U$6.1 81.28,56.53 81.28,56.9 81.03,56.9 81.03,57.15 80.77,57.15 80.77,57.4 80.52,57.4 80.52,57.66 80.26,57.66 80.26,57.91 80.01,57.91 80.01,58.17 79.76,58.17 79.76,58.42 JP68.3
N$333
  Top 0.406: U$6.4 83.82,55.23 83.82,55.12 84.07,55.12 84.07,54.86 84.33,54.86 84.33,54.61 84.58,54.61 84.58,54.36 84.84,54.36 84.84,54.1 85.09,54.1 85.09,53.85 85.34,53.85 85.34,53.59 85.6,53.59 85.6,53.34 JP69.1
N$334
  Top 0.406: U$6.5 JP69.2
N$335  (1 unrouted)
N$336
  Top 0.406: 83.35,56.53 83.82,56.53 83.82,56.9 84.07,56.9 84.07,57.15 84.33,57.15 84.33,57.4 84.58,57.4 84.58,57.66 84.84,57.66 84.84,57.91 85.09,57.91 85.09,58.17 85.34,58.17 85.34,58.42 86.36,58.42
N$337
  Top 0.406: U$7.3 81.28,24.75 81.28,24.64 81.03,24.64 81.03,24.38 80.77,24.38 80.77,24.13 80.52,24.13 80.52,23.88 80.26,23.88 80.26,23.62 80.01,23.62 80.01,23.37 79.76,23.37 | 79.5,23.37 79.76,23.37 | 79.76,23.37 79.76,23.11 79.5,23.11 79.5,22.86 JP70.1
N$338
  Top 0.406: U$7.2 JP70.2
N$339
  Top 0.406: U$7.1 81.28,26.05 81.28,26.42 81.03,26.42 81.03,26.67 80.77,26.67 80.77,26.92 80.52,26.92 80.52,27.18 80.26,27.18 80.26,27.43 80.01,27.43 80.01,27.69 79.76,27.69 79.76,27.94 JP70.3
N$340
  Top 0.406: U$7.4 83.82,24.75 83.82,24.64 84.07,24.64 84.07,24.38 84.33,24.38 84.33,24.13 84.58,24.13 84.58,23.88 84.84,23.88 84.84,23.62 85.09,23.62 85.09,23.37 85.34,23.37 85.34,23.11 85.6,23.11 85.6,22.86 JP71.1
N$341
  Top 0.406: U$7.5 JP71.2
N$342  (1 unrouted)
N$343
  Top 0.406: 83.35,26.05 83.82,26.05 83.82,26.42 84.07,26.42 84.07,26.67 84.33,26.67 84.33,26.92 84.58,26.92 84.58,27.18 84.84,27.18 84.84,27.43 85.09,27.43 85.09,27.69 85.34,27.69 85.34,27.94 86.36,27.94
N$344
  Top 0.406: U$8.3 81.28,34.91 81.28,34.8 81.03,34.8 81.03,34.54 80.77,34.54 80.77,34.29 80.52,34.29 80.52,34.04 80.26,34.04 80.26,33.78 80.01,33.78 80.01,33.53 79.76,33.53 | 79.5,33.53 79.76,33.53 | 79.76,33.53 79.76,33.27 79.5,33.27 79.5,33.02 JP72.1
N$345
  Top 0.406: U$8.2 JP72.2
N$346
  Top 0.406: U$8.1 81.28,36.21 81.28,36.58 81.03,36.58 81.03,36.83 80.77,36.83 80.77,37.08 80.52,37.08 80.52,37.34 80.26,37.34 80.26,37.59 80.01,37.59 80.01,37.85 79.76,37.85 79.76,38.1 JP72.3
N$347
  Top 0.406: U$8.4 83.82,34.91 83.82,34.8 84.07,34.8 84.07,34.54 84.33,34.54 84.33,34.29 84.58,34.29 84.58,34.04 84.84,34.04 84.84,33.78 85.09,33.78 85.09,33.53 85.34,33.53 85.34,33.27 85.6,33.27 85.6,33.02 JP73.1
N$348
  Top 0.406: U$8.5 JP73.2
N$349  (1 unrouted)
N$350
  Top 0.406: 83.35,36.21 83.82,36.21 83.82,36.58 84.07,36.58 84.07,36.83 84.33,36.83 84.33,37.08 84.58,37.08 84.58,37.34 84.84,37.34 84.84,37.59 85.09,37.59 85.09,37.85 85.34,37.85 85.34,38.1 86.36,38.1
N$359
  Top 0.406: IC21.1 58.42,5.82 arc90 55.88,3.28 JP75.1
N$360  (via drill 0.6)
  Top 0.406: v62.74,8.89 61.72,7.62 IC21.2
  Bottom 0.406: JP75.2 IC21.2 v62.74,8.89
N$361
  Top 0.406: JP75.3 62.74,4.83 IC21.3
N$362
  Top 0.406: JP75.4 64.01,4.83 IC21.4
N$363  (via drill 0.6)
  Top 0.406: v67.06,8.89 67.82,7.87 IC21.7
  Bottom 0.406: JP75.7 IC21.7 v67.06,8.89
N$364
  Top 0.406: JP75.5 65.53,5.08 IC21.5
N$365
  Top 0.406: JP75.6 66.8,4.83 IC21.6
N$366
  Top 0.406: IC21.8 71.12,5.82 arc-90 73.66,3.28 JP75.8
N$367
  Top 0.406: IC21.9 71.12,11.96 arc90 73.66,14.5 JP74.1
N$368  (via drill 0.6)
  Top 0.406: v69.09,8.89 68.07,9.91 IC21.10
  Bottom 0.406: JP74.2 IC21.10 v69.09,8.89
N$369
  Top 0.406: JP74.3 66.8,12.95 IC21.11
N$370
  Top 0.406: JP74.4 65.53,12.95 IC21.12
N$371
  Top 0.406: JP74.5 64.01,12.95 IC21.13
N$372
  Top 0.406: JP74.6 62.74,12.95 IC21.14
N$373
  Top 0.406: IC21.16 58.42,11.96 arc-90 55.88,14.5 JP74.8
N$374  (via drill 0.6)
  Top 0.406: v60.71,8.89 61.47,9.65 IC21.15
  Bottom 0.406: JP74.7 IC21.15 v60.71,8.89
N$375
  Top 0.406: IC22.1 58.42,23.6 arc90 55.88,21.06 JP77.1
N$376  (via drill 0.6)
  Top 0.406: v62.74,26.67 61.72,25.4 IC22.2
  Bottom 0.406: JP77.2 IC22.2 v62.74,26.67
N$377
  Top 0.406: JP77.3 62.74,22.61 IC22.3
N$378
  Top 0.406: JP77.4 64.01,22.61 IC22.4
N$379  (via drill 0.6)
  Top 0.406: v67.06,26.67 67.82,25.65 IC22.7
  Bottom 0.406: JP77.7 IC22.7 v67.06,26.67
N$380
  Top 0.406: JP77.5 65.53,22.86 IC22.5
N$381
  Top 0.406: JP77.6 66.8,22.61 IC22.6
N$382
  Top 0.406: IC22.8 71.12,23.6 arc-90 73.66,21.06 JP77.8
N$383
  Top 0.406: IC22.9 71.12,29.74 arc90 73.66,32.28 JP76.1
N$384  (via drill 0.6)
  Top 0.406: v69.09,26.67 68.07,27.69 IC22.10
  Bottom 0.406: JP76.2 IC22.10 v69.09,26.67
N$385
  Top 0.406: JP76.3 66.8,30.73 IC22.11
N$386
  Top 0.406: JP76.4 65.53,30.73 IC22.12
N$387
  Top 0.406: JP76.5 64.01,30.73 IC22.13
N$388
  Top 0.406: JP76.6 62.74,30.73 IC22.14
N$389
  Top 0.406: IC22.16 58.42,29.74 arc-90 55.88,32.28 JP76.8
N$390  (via drill 0.6)
  Top 0.406: v60.71,26.67 61.47,27.43 IC22.15
  Bottom 0.406: JP76.7 IC22.15 v60.71,26.67
N$391
  Top 0.406: IC23.1 58.42,41.38 arc90 55.88,38.84 JP79.1
N$392  (via drill 0.6)
  Top 0.406: v62.74,44.45 61.72,43.18 IC23.2
  Bottom 0.406: JP79.2 IC23.2 v62.74,44.45
N$393
  Top 0.406: JP79.3 62.74,40.39 IC23.3
N$394
  Top 0.406: JP79.4 64.01,40.39 IC23.4
N$395  (via drill 0.6)
  Top 0.406: v67.06,44.45 67.82,43.43 IC23.7
  Bottom 0.406: JP79.7 IC23.7 v67.06,44.45
N$396
  Top 0.406: JP79.5 65.53,40.64 IC23.5
N$397
  Top 0.406: JP79.6 66.8,40.39 IC23.6
N$398
  Top 0.406: IC23.8 71.12,41.38 arc-90 73.66,38.84 JP79.8
N$399
  Top 0.406: IC23.9 71.12,47.52 arc90 73.66,50.06 JP78.1
N$400  (via drill 0.6)
  Top 0.406: v69.09,44.45 68.07,45.47 IC23.10
  Bottom 0.406: JP78.2 IC23.10 v69.09,44.45
N$401
  Top 0.406: JP78.3 66.8,48.51 IC23.11
N$402
  Top 0.406: JP78.4 65.53,48.51 IC23.12
N$403
  Top 0.406: JP78.5 64.01,48.51 IC23.13
N$404
  Top 0.406: JP78.6 62.74,48.51 IC23.14
N$405
  Top 0.406: IC23.16 58.42,47.52 arc-90 55.88,50.06 JP78.8
N$406  (via drill 0.6)
  Top 0.406: v60.71,44.45 61.47,45.21 IC23.15
  Bottom 0.406: JP78.7 IC23.15 v60.71,44.45
N$407
  Top 0.406: R17.2 60.96,59.94 58.93,59.94 | R18.2 58.93,59.94 | 58.93,59.94 57.4,59.94 JP80.1
N$408
  Top 0.406: R17.1 60.96,54.36 58.93,54.36 | R18.1 58.93,54.36 | 58.93,54.36 57.4,54.36 JP80.2
N$409
  Top 0.406: R19.2 71.12,59.94 69.09,59.94 | R20.2 69.09,59.94 | 69.09,59.94 67.56,59.94 JP81.1
N$410
  Top 0.406: R19.1 71.12,54.36 69.09,54.36 | R20.1 69.09,54.36 | 69.09,54.36 67.56,54.36 JP81.2
N$411
  Top 0.406: IC24.1 59.16,76.2 arc90 56.62,78.74 JP82.1
N$412
  Top 0.406: IC24.2 58.17,73.91 JP82.2
N$413
  Top 0.406: IC24.4 JP82.4
N$414
  Top 0.406: IC24.5 57.66,69.85 JP82.5
N$415
  Top 0.406: IC24.6 58.17,68.33 JP82.6
N$416
  Top 0.406: IC24.3 57.66,72.39 JP82.3
N$417
  Top 0.406: IC24.8 65.3,66.04 arc90 67.84,63.5 JP83.1
N$418
  Top 0.406: IC24.9 66.29,68.33 JP83.2
N$419
  Top 0.406: IC24.10 66.8,69.85 JP83.3
N$420
  Top 0.406: IC24.11 JP83.4
N$421
  Top 0.406: IC24.12 66.8,72.39 JP83.5
N$422
  Top 0.406: IC24.13 66.29,73.91 JP83.6
N$423
  Top 0.406: IC24.14 65.3,76.2 arc-90 67.84,78.74 JP83.7
N$424
  Top 0.406: IC24.7 59.16,66.04 arc-90 56.62,63.5 JP82.7
N$425
  Top 0.406: IC25.1 76.94,76.2 arc90 74.4,78.74 JP84.1
N$426
  Top 0.406: IC25.2 75.95,73.91 JP84.2
N$427
  Top 0.406: IC25.4 JP84.4
N$428
  Top 0.406: IC25.5 75.44,69.85 JP84.5
N$429
  Top 0.406: IC25.6 75.95,68.33 JP84.6
N$430
  Top 0.406: IC25.3 75.44,72.39 JP84.3
N$431
  Top 0.406: IC25.8 83.08,66.04 arc90 85.62,63.5 JP85.1
N$432
  Top 0.406: IC25.9 84.07,68.33 JP85.2
N$433
  Top 0.406: IC25.10 84.58,69.85 JP85.3
N$434
  Top 0.406: IC25.11 JP85.4
N$435
  Top 0.406: IC25.12 84.58,72.39 JP85.5
N$436
  Top 0.406: IC25.13 84.07,73.91 JP85.6
N$437
  Top 0.406: IC25.14 83.08,76.2 arc-90 85.62,78.74 JP85.7
N$438
  Top 0.406: IC25.7 76.94,66.04 arc-90 74.4,63.5 JP84.7
N$439
  Top 0.406: IC26.1 71.12,87.1 arc90 68.58,84.56 JP87.1
N$440  (via drill 0.6)
  Top 0.406: v75.44,90.17 74.42,88.9 IC26.2
  Bottom 0.406: JP87.2 IC26.2 v75.44,90.17
N$441
  Top 0.406: JP87.3 75.44,86.11 IC26.3
N$442
  Top 0.406: JP87.4 76.71,86.11 IC26.4
N$443  (via drill 0.6)
  Top 0.406: v79.76,90.17 80.52,89.15 IC26.7
  Bottom 0.406: JP87.7 IC26.7 v79.76,90.17
N$444
  Top 0.406: JP87.5 78.23,86.36 IC26.5
N$445
  Top 0.406: JP87.6 79.5,86.11 IC26.6
N$446
  Top 0.406: IC26.8 83.82,87.1 arc-90 86.36,84.56 JP87.8
N$447
  Top 0.406: IC26.9 83.82,93.24 arc90 86.36,95.78 JP86.1
N$448  (via drill 0.6)
  Top 0.406: v81.79,90.17 80.77,91.19 IC26.10
  Bottom 0.406: JP86.2 IC26.10 v81.79,90.17
N$449
  Top 0.406: JP86.3 79.5,94.23 IC26.11
N$450
  Top 0.406: JP86.4 78.23,94.23 IC26.12
N$451
  Top 0.406: JP86.5 76.71,94.23 IC26.13
N$452
  Top 0.406: JP86.6 75.44,94.23 IC26.14
N$453
  Top 0.406: IC26.16 71.12,93.24 arc-90 68.58,95.78 JP86.8
N$454  (via drill 0.6)
  Top 0.406: v73.41,90.17 74.17,90.93 IC26.15
  Bottom 0.406: JP86.7 IC26.15 v73.41,90.17
N$455
  Top 0.406: IC27.1 arc90 63.5,94.67 JP88.1
N$456
  Top 0.406: IC27.2 JP88.2
N$457
  Top 0.406: IC27.4 arc-90 55.88,94.67 JP88.4
N$458
  Top 0.406: IC27.3 JP88.3
N$459
  Top 0.406: IC27.5 arc90 55.88,85.67 JP89.1
N$460
  Top 0.406: IC27.6 JP89.2
N$461
  Top 0.406: IC27.7 JP89.3
N$462
  Top 0.406: IC27.8 arc-90 63.5,85.67 JP89.4
N$463
  Top 0.406: Q10.2 33.27,86.02 33.27,83.82 JP91.3
N$464
  Top 0.406: Q10.3 32.51,88.9 JP91.1
N$465
  Top 0.406: R23.2 20.32,98.04 18.29,98.04 | R24.2 18.29,98.04 | 18.29,98.04 16.76,98.04 JP92.1
N$466
  Top 0.406: R23.1 20.32,92.46 18.29,92.46 | R24.1 18.29,92.46 | 18.29,92.46 16.76,92.46 JP92.2
N$467
  Top 0.406: R25.2 30.48,98.04 28.45,98.04 | R26.2 28.45,98.04 | 28.45,98.04 26.92,98.04 JP93.1
N$468
  Top 0.406: R25.1 30.48,92.46 28.45,92.46 | R26.1 28.45,92.46 | 28.45,92.46 26.92,92.46 JP93.2
N$469
  Top 0.406: R27.2 40.64,98.04 38.61,98.04 | R28.2 38.61,98.04 | 38.61,98.04 37.08,98.04 JP94.1
N$470
  Top 0.406: R27.1 40.64,92.46 38.61,92.46 | R28.1 38.61,92.46 | 38.61,92.46 37.08,92.46 JP94.2
N$471
  Top 0.406: R29.2 50.8,98.04 48.77,98.04 | R30.2 48.77,98.04 | 48.77,98.04 47.24,98.04 JP95.1
N$472
  Top 0.406: R29.1 50.8,92.46 48.77,92.46 | R30.1 48.77,92.46 | 48.77,92.46 47.24,92.46 JP95.2

## Text on the board
Bottom: SOIC-16 | 1206 | 0603 | 1206 | 0603 | 1206 | 0603 | 1206 | 0603 | 1206 | 0603 | SOIC-8 | 1206 | 0603 | 0603 | 1206 | SOT 23 | 1206 | 0603 | SOIC-16 | SOIC-14 | 1206 | 0603 | 1206 | 0603 | SOIC-14 | SOIC-14 | SOIC-14 | 1206 | 0603 | SOIC-16 | SOIC-14 | 1206 | 0603 | 1206 | 0603 | SOT 323 | 1206 | 0603 | SOIC-8 | SOIC-16 | SOIC-14 | SOT 323 | SOT 23 | SOIC-8 | SOIC-16 | SOT 23 | SOT 323 | SOIC-16 | SOIC-14 | SOIC-8 | SOT 23 | SOT 323 | SOIC-16 | SOT 23 | SOIC-16 | SOT 323 | SOIC-8 | SOIC-14 | SOT 23 | SOT 323
bNames: C B E | C B E | C B E | C B E | C B E | C B E